# EAGLE board Not (EAGLE 9.7.0)

Size 157.84 x 40.49 mm. Coordinates in mm from the lower left corner, seen from the top.
Outline: 0,0 157.84,0 157.84,40.49 0,40.49 0,0
Copper layers (1*16): Top 0.035mm / dielectric 1.5mm / Bottom 0.035mm
Design rules "default": minimum track width 6mil, minimum drill 0.35mm, track to track 6mil, track to pad 6mil, pad to pad 6mil, via to via 6mil, smd to smd 6mil, copper to edge 40mil, drill to drill 6mil, minimum pad ring 10mil, minimum via ring 8mil, stop-mask expansion 4mil, vias tented up to drill 0mil, thermal gap 10mil

## Footprints (pad centres in the part's own frame; a part is rotated, then mirrored left to right if it is on the bottom)
BATTERY-GENERIC = drill 1.118 pad 3.15 octagon: + 2.54,0; - -2.54,0
LEDRD254W60D565H860B = drill 0.981 pad 1.581: 1 -1.27,0; 2 1.27,0
RESAD1016W63L850D250B = drill 0.83 pad 1.43: 1 -5.08,0; 2 5.08,0
78B04ST = drill 0.8: 1 -3.81,-3.81; 2 -1.27,-3.81; 3 1.27,-3.81; 4 3.81,-3.81; 5 3.81,3.81; 6 1.27,3.81; 7 -1.27,3.81; 8 -3.81,3.81
DIP762W53P254L1969H508Q14B = drill 0.743 pad 1.343: 1 -3.81,7.62; 2 -3.81,5.08; 3 -3.81,2.54; 4 -3.81,0; 5 -3.81,-2.54; 6 -3.81,-5.08; 7 -3.81,-7.62; 8 3.81,-7.62; 9 3.81,-5.08; 10 3.81,-2.54; 11 3.81,0; 12 3.81,2.54; 13 3.81,5.08; 14 3.81,7.62

## Placement (x,y rotation side)
BAT1  4.5V  [BATTERY-GENERIC]  8.26,32.23 270 top
D1  RED  [LEDRD254W60D565H860B]  128.92,18.41 180 top
D2  RED  [LEDRD254W60D565H860B]  136.54,18.41 0 top
D3  RED  [LEDRD254W60D565H860B]  144.16,18.41 0 top
D4  RED  [LEDRD254W60D565H860B]  151.78,18.41 0 top
R1  1k  [RESAD1016W63L850D250B]  130.19,10.79 90 top
R2  1k  [RESAD1016W63L850D250B]  135.27,10.79 90 top
R3  1k  [RESAD1016W63L850D250B]  142.89,10.79 90 top
R4  1k  [RESAD1016W63L850D250B]  150.51,10.79 90 top
SW1  SPST-478B04ST  [78B04ST]  24.78,9.53 0 top
U1  74HC04_PDIP  [DIP762W53P254L1969H508Q14B]  48.91,9.53 90 top
U2  74HC04_PDIP  [DIP762W53P254L1969H508Q14B]  71.77,9.53 90 top
U3  74HC04_PDIP  [DIP762W53P254L1969H508Q14B]  94.63,9.53 90 top
U4  74HC04_PDIP  [DIP762W53P254L1969H508Q14B]  117.49,9.53 90 top

## Library data of the parts
BAT1 R1-R4 SW1 U1-U4 = Tinkercad
D1-D4 = Tinkercad; CATEGORY: Opto-Electronic; SUB-CATEGORY: LED; VALUE: LED_RED

## Nets
BAT1+: BAT1.+ SW1.5 SW1.6 SW1.7 SW1.8 U1.14 U2.14 U3.14 U4.14
BAT1-: BAT1.- D1.2 D2.2 D3.2 D4.2 U1.7 U2.7 U3.7 U4.7
D1_A: D1.1 R1.2
D2_A: D2.1 R2.2
D3_A: D3.1 R3.2
D4_A: D4.1 R4.2
U1_1A: SW1.1 U1.1
U1_1Y: R1.1 U1.2
U2_1A: SW1.2 U2.1
U2_1Y: R2.1 U2.2
U3_1A: SW1.3 U3.1
U3_1Y: R3.1 U3.2
U4_1A: SW1.4 U4.1
U4_1Y: R4.1 U4.2

## Tracks (layer width: path | path; a pad name or v marks a point on that pad's centre or on a via)
BAT1+  (8 unrouted)
BAT1-  (8 unrouted)
D1_A  (1 unrouted)
D2_A  (1 unrouted)
D3_A  (1 unrouted)
D4_A  (1 unrouted)
U1_1A  (1 unrouted)
U1_1Y  (1 unrouted)
U2_1A  (1 unrouted)
U2_1Y  (1 unrouted)
U3_1A  (1 unrouted)
U3_1Y  (1 unrouted)
U4_1A  (1 unrouted)
U4_1Y  (1 unrouted)